# Altium PCB ignatova_telemetry_board.PcbDoc (part 2 of 2)
Units mm, origin at the board's own origin, x right, y up, seen from the top; angles counter-clockwise.
Board outline 105.78 x 126.4 mm, 4 copper layers (Top Layer, Signal Layer 1, Signal Layer 2, Bottom Layer), stack 1.556 mm thick; 56 components, 51 nets, 286 pads, 699 vias.
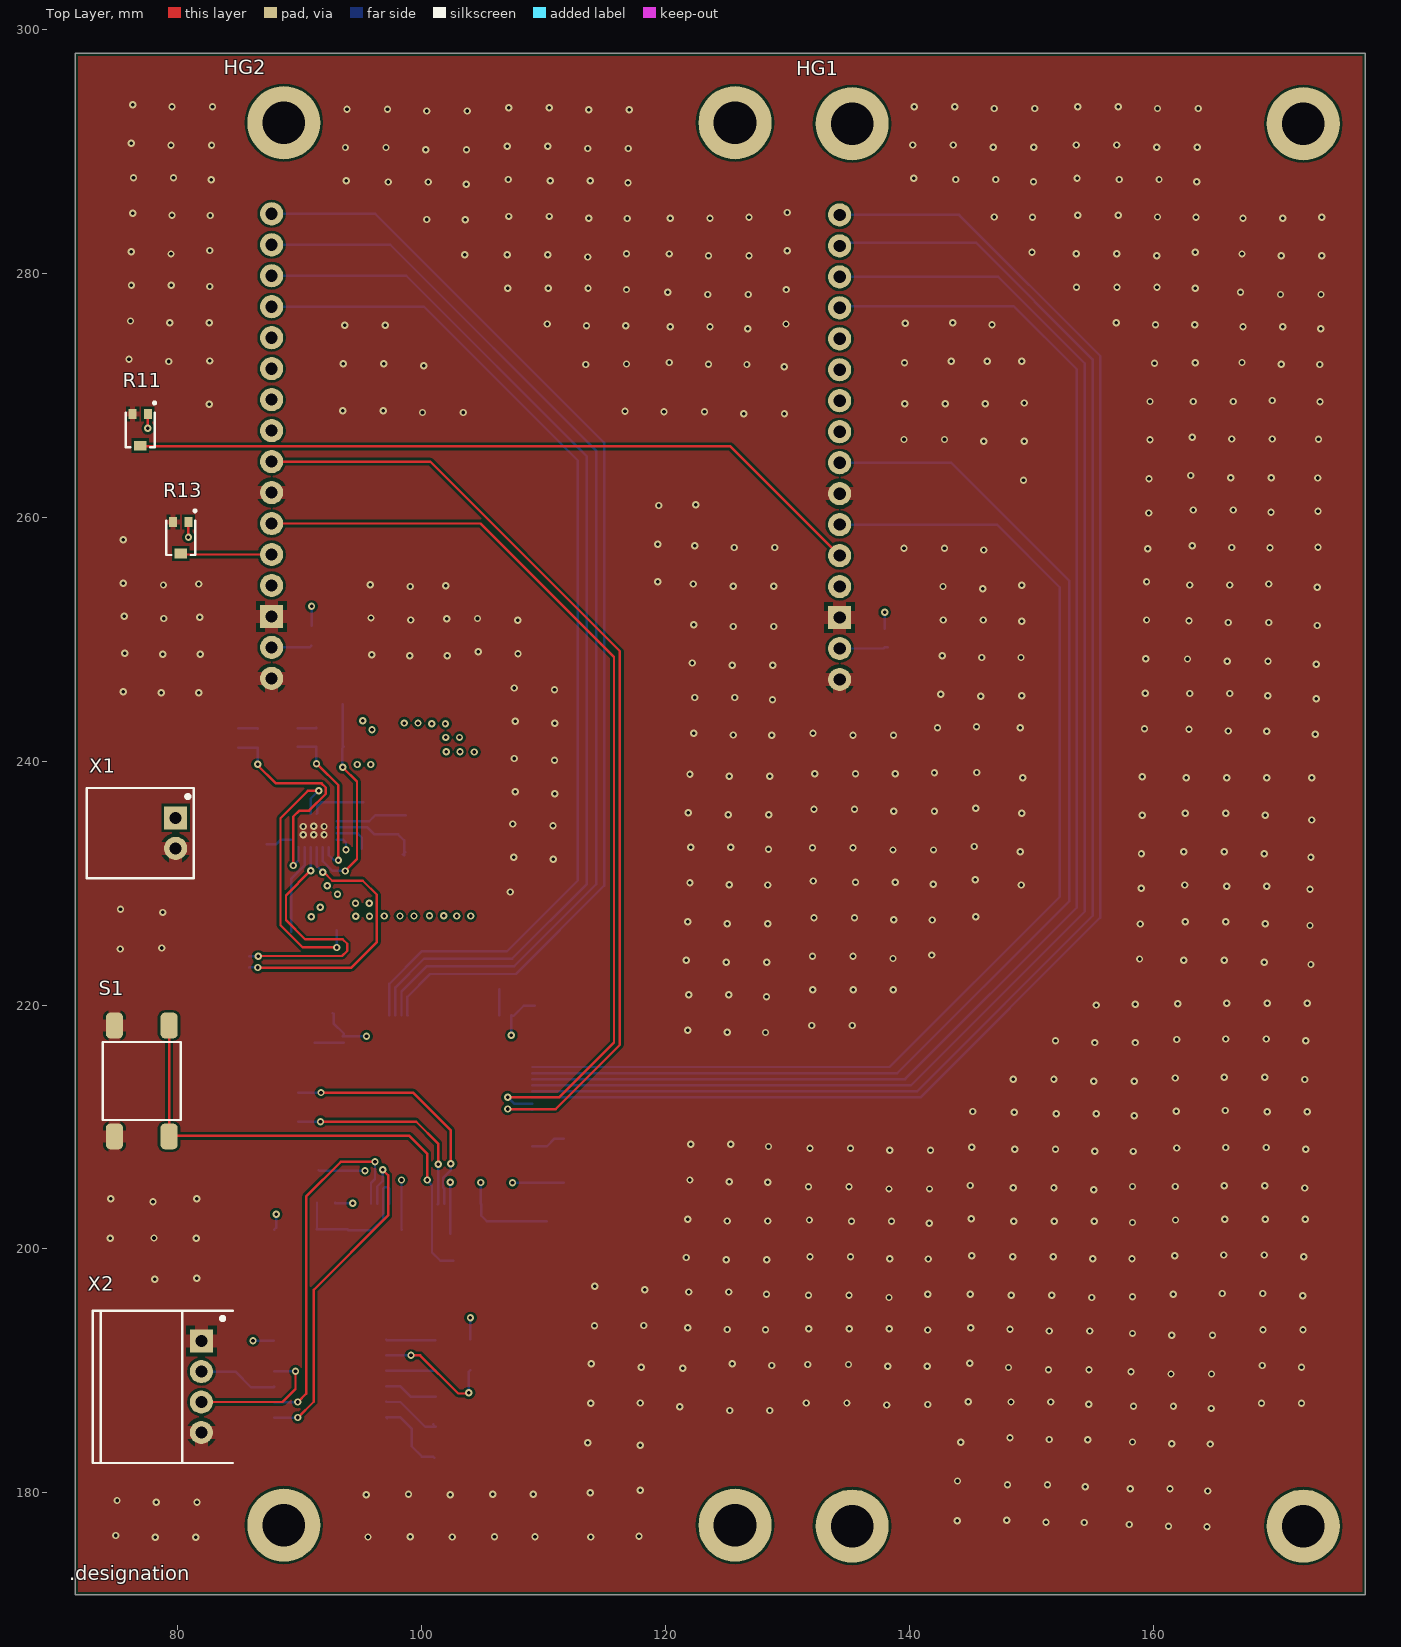
[diagram p0: Top Layer view]

## Via types
v1: diameter 0.6, hole 0.3, Top Layer to Bottom Layer, tented both sides, 699 vias

## Nets (pads, with @x,y where several pads share a name; then routed paths per layer and width w, separated by ;. In a path a pad name is that pad's centre, name@x,y a point inside that pad or via, vN(x,y) a via of type N, cw(c..) or ccw(c..) an arc to the next point about the centre after c; other vN are vias at no path point) (continued)
PD6: DD2.87 HG2.4 | length 77.1
  Top Layer w0.2: HG2.4 104.835,259.49 115.775,248.55 115.775,216.925 111.3,212.45 v1(107.05,212.45)
  Bottom Layer w0.2: v1(107.05,212.45) 107.575,211.925 DD2.87
PD7: DD2.88 HG2.6 | length 80.7
  Top Layer w0.2: HG2.6 100.705,264.57 116.25,249.025 116.25,216.725 111,211.475 v1(107.05,211.475)
  Bottom Layer w0.2: v1(107.05,211.475) 109.025,211.475 DD2.88
PD8: DD2.55 HG2.11 | length 86.3
  Bottom Layer w0.2: HG2.11 100.18,277.27 112.8,264.65 112.8,230.225 106.975,224.4 100,224.4 97.35,221.75 DD2.55
PD9: DD2.56 HG2.12 | length 88.6
  Bottom Layer w0.2: HG2.12 98.74,279.81 113.55,265 113.55,229.925 107.425,223.8 100.2,223.8 97.85,221.45 DD2.56
PD10: DD2.57 HG2.13 | length 90.7
  Bottom Layer w0.2: HG2.13 97.425,282.35 114.305,265.47 114.305,229.905 107.6,223.2 100.45,223.2 98.35,221.1 DD2.57
PD11: DD2.58 HG2.14 | length 92.8
  Bottom Layer w0.2: HG2.14 96.185,284.89 114.975,266.1 114.975,229.8 107.725,222.55 100.7,222.55 98.825,220.675 98.825,219.175 DD2.58
RS232_RX: DD3.14 X2.3 | length 11.4
  Top Layer w0.2: X2.3@81.964,187.475 X2.3 88.6,187.45 89.655,188.505 v1(89.655,189.98)
  Bottom Layer w0.2: X2.3@82.489,187.45 X2.3@82.496,187.457 ; DD3.14@87.9,189.98 v1(89.655,189.98)
RS232_TX: DD3.13 X2.2 | length 6.6
  Top Layer w0.2: X2.2@82.164,189.925 X2.2@82.189,189.95
  Bottom Layer w0.2: X2.2 84.725,189.95 86.025,188.65 87.84,188.65 DD3.13@87.9,188.71
UART_RX: DD2.24 DD3.12 | length 29.5
  Top Layer w0.2: v1(89.85,187.45) 90.525,188.125 90.525,204.3 93.375,207.15 v1(96.175,207.15)
  Bottom Layer w0.2: DD3.12@87.9,187.44 89.84,187.44 v1(89.85,187.45) ; DD2.24 95.85,205.424 96.175,205.749 v1(96.175,207.15)
UART_TX: DD2.23 DD3.11 | length 28.5
  Top Layer w0.2: v1(89.85,186.175) 91.15,187.475 91.15,196.65 97.25,202.75 97.25,206.05 v1(96.8,206.5)
  Bottom Layer w0.2: DD3.11@87.9,186.17 89.845,186.17 v1(89.85,186.175) ; DD2.23 96.35,205.1 96.8,205.55 v1(96.8,206.5)
pads on no net: DD1.5 DD1.6 DD2.1 DD2.2 DD2.3 DD2.4 DD2.5 DD2.7 DD2.8 DD2.9 DD2.15 DD2.16 DD2.17 DD2.18 DD2.25 DD2.26 DD2.29 DD2.30 DD2.31 DD2.32 DD2.33 DD2.34 DD2.35 DD2.36 DD2.37 DD2.38 DD2.39 DD2.40 DD2.41 DD2.42 DD2.43 DD2.44 DD2.45 DD2.46 DD2.47 DD2.48 DD2.51 DD2.52 DD2.53 DD2.54 DD2.59 DD2.60 DD2.61 DD2.62 DD2.63 DD2.64 DD2.65 DD2.66 DD2.67 DD2.68 DD2.69 DD2.70 DD2.71 DD2.72 DD2.76 DD2.77 DD2.78 DD2.79 DD2.80 DD2.89 DD2.90 DD2.91 DD2.92 DD2.93 DD2.95 DD2.96 DD2.97 DD2.98 DD3.7 DD3.8 DD3.9 DD3.10 HG1.7 HG1.8 HG1.9 HG1.10 HG2.7 HG2.8 HG2.9 HG2.10

## Polygon pours and split planes (outlines as drawn)
GND on Top Layer (solid, pour order 108): 71.575,298.075 177.35,298.075 177.35,171.675 71.575,171.675
no net on Top Layer "Top Layer-No Net 1" (solid, pour order 24): 90.975,239.525
no net on Top Layer "Top Layer-No Net 2" (solid, pour order 20): 94.125,258.325
no net on Top Layer "Top Layer-No Net 3" (solid, pour order 6): 93.85,239.45
no net on Top Layer "Top Layer-No Net" (solid, pour order 4): 93.025,258.175
+5V on Signal Layer 2 "Signal Layer 2-+3.3V" (solid, pour order 62): 71.475,298.1 177.525,298.1 177.45,298.025 177.519,235.4 71.475,235.4
+3.3V on Signal Layer 2 "Signal Layer 2-+5V" (solid, pour order 64): 71.65,171.625 71.75,171.525 177.35,171.525 177.35,233.425 71.854,233.425
GND on Bottom Layer (solid, pour order 106): 71.6,298.05 177.375,298.05 177.375,171.65 71.725,171.65 71.6,171.775
+5V on Bottom Layer "Bottom Layer-+5V" (solid, pour order 92): 94.225,237.375 104.85,237.375 104.85,241.425 102.3,243.975 93.8,243.975 93.8,242.225 93.8,241.925 94.225,241.925
+3.3V on Bottom Layer "Bottom Layer-+3.3V" (solid, pour order 90): 89.95,230.375 89.95,228.65 89.625,228.65 89.625,226.775 104.65,226.775 104.65,230.375
NetC8_1 on Bottom Layer "Bottom Layer-NetC8_1" (solid, pour order 88): 88.1,235.85 88.65,235.3 89.7,235.3 89.7,233.875 88.325,233.875 88.1,234.1 78.175,234.1 78.175,237.125 81.334,237.125 82.773,235.85
no net on Bottom Layer "Bottom Layer-No Net" (solid, pour order 82): 78.525,246.325
GND on Signal Layer 1 "Signal Layer 1-GND" (solid, pour order 60): 71.6,298 177.375,298 177.375,171.725 177.45,171.65 71.6,171.65

## Silkscreen, mask and mechanical layers (free items; w line width, h text height)
Top Overlay:
  text ".designation" at 71.1,172.425 h2
Bottom Overlay:
  text ".pcb_dec_number" at 87.175,172.325 h2
Board:
  the board outline again, w0.1
Assembly Notes (Mech5):
  text "'.title'" at 72.05,169.45 h2
  text "'.project'_'.pcb_dec_number'['.Pcb_File_Name_No_Path']" at 71.925,167.025 h2